# Altium PCB PCBModuleM02.PcbDoc (part 2 of 2)
Units mm, origin at the board's own origin, x right, y up, seen from the top; angles counter-clockwise.
Board outline 149.86 x 99.06 mm, 2 copper layers (Top Layer, Bottom Layer); 167 components, 166 nets, 568 pads, 73 vias.
Unrouted connection lines stored in the file: 37.
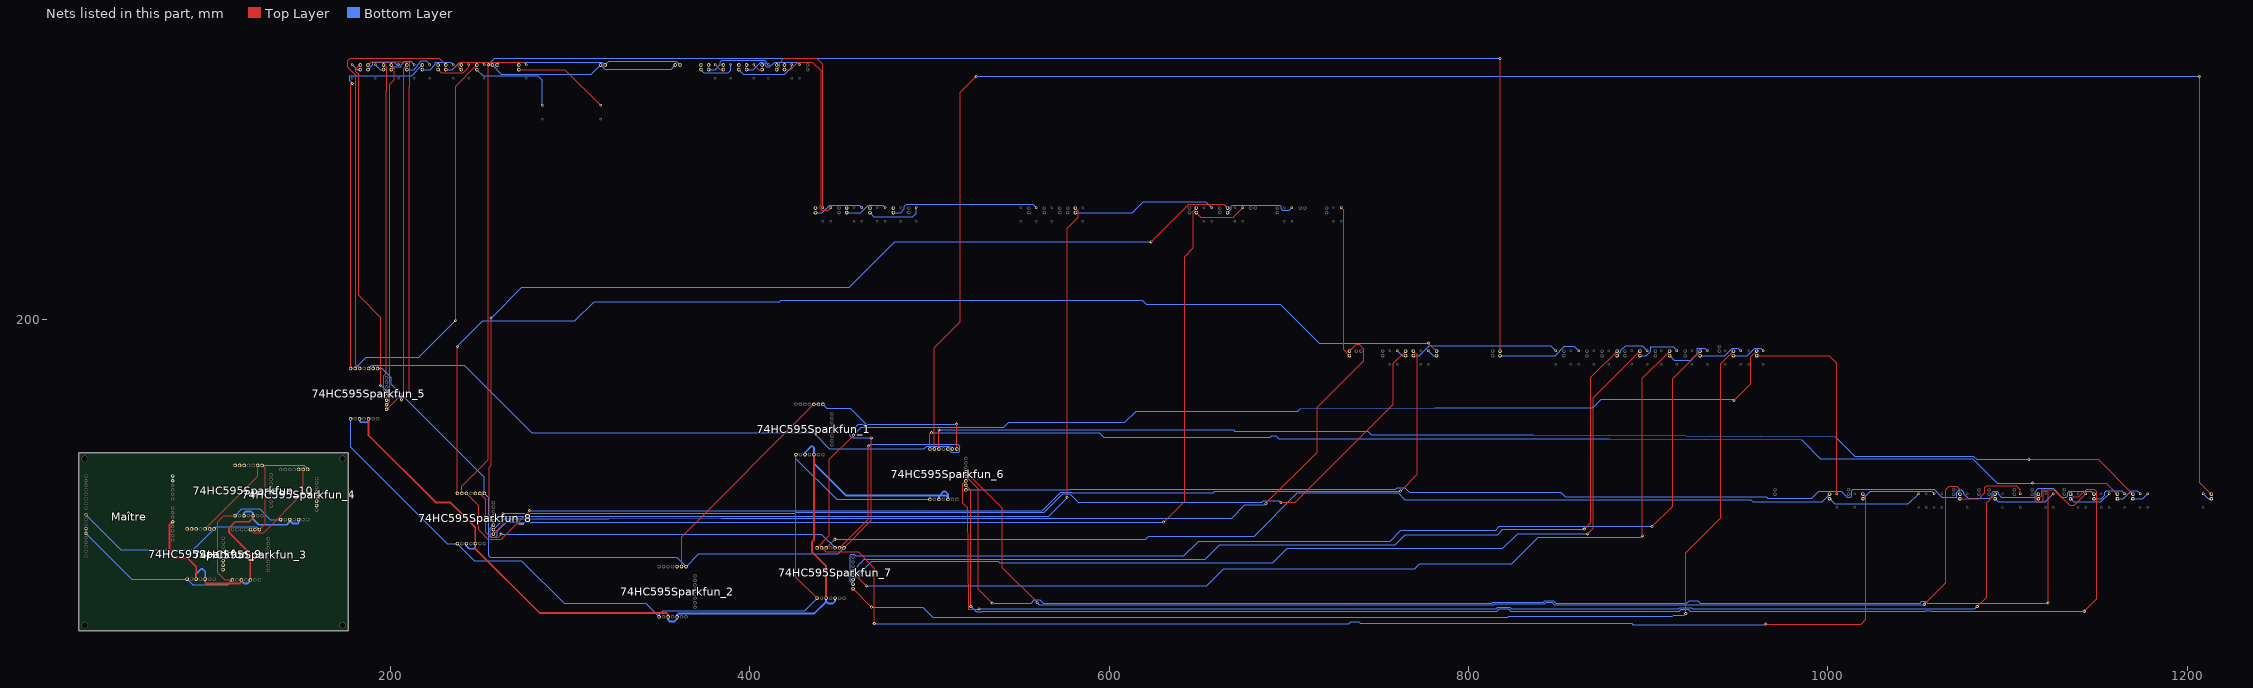
[diagram p2: the nets of this part, all layers, seen from the top]

## Via types
v1: diameter 1.7, hole 0.8, Top Layer to Bottom Layer, 73 vias

## Nets (pads, with @x,y where several pads share a name; then routed paths per layer and width w, separated by ;. In a path a pad name is that pad's centre, name@x,y a point inside that pad or via, vN(x,y) a via of type N, cw(c..) or ccw(c..) an arc to the next point about the centre after c; other vN are vias at no path point) (continued)
Net29_1: 29.1 R?.2@440.69,262.255 | length 110.6
  Top Layer w0.5: 29.1@415.036,339.09 416.687,340.741 416.687,342.9 419.049,345.262 437.464,345.262 440.69,342.036 R?.2@440.69,262.255
Net29_2: 29.2 74HC595Sparkfun_4.16
Net30_1: 30.1 R?.2@423.418,341.884 | length 33.6
  Bottom Layer w0.5: 30.1@393.954,339.09 396.469,336.575 419.633,336.575 423.418,340.36 R?.2@423.418,341.884
Net30_2: 30.2 74HC595Sparkfun_4.17
Net31_1: 31.1 R?.2@402.336,341.884 | length 5.7
  Top Layer w0.5: R?.2@402.336,341.884 405.13,339.09 31.1@406.908,339.09
Net31_2: 31.2 74HC595Sparkfun_4.18
Net32_1: 32.1 R?.2@380.746,341.884 | length 5.7
  Top Layer w0.5: R?.2@380.746,341.884 383.54,339.09 32.1@385.318,339.09
Net32_2: 32.2 74HC595Sparkfun_4.19
Net33_1: 33.1 R?.2@284.607,319.151 | length 52.8
  Bottom Layer w0.5: 33.1@248.158,339.09 251.587,335.661 281.94,335.661 284.607,332.994 R?.2@284.607,319.151
Net33_2: 33.2 74HC595Sparkfun_5.13 | length 214.1
  Top Layer w0.5: v1(236.372,199.466) 236.423,272.669 236.423,329.895 33.2@248.158,341.63
  Bottom Layer w0.5: 74HC595Sparkfun_5.13@180.42,172.72 186.668,178.968 215.875,178.968 v1(236.372,199.466)
Net34_1: 34.1 R?.2@252.222,341.884 | length 23.7
  Bottom Layer w0.5: 34.1@230.886,339.09 234.569,339.09 238.76,343.281 250.825,343.281 R?.2@252.222,341.884
Net34_2: 34.2 74HC595Sparkfun_5.12 | length 230.4
  Top Layer w0.5: 74HC595Sparkfun_5.12@182.92,172.72 180.848,174.792 180.848,336.017 176.403,340.462 176.403,343.865 177.8,345.262 227.254,345.262 34.2@230.886,341.63
Net35_1: 35.1 R?.2@234.95,341.884 | length 20.3
  Bottom Layer w0.5: 35.1@217.805,339.09 222.098,339.09 224.917,341.909 224.917,343.281 233.553,343.281 R?.2@234.95,341.884
Net35_2: 35.2 74HC595Sparkfun_5.14 | length 206.9
  Top Layer w0.5: 74HC595Sparkfun_5.14@177.92,172.72 177.902,172.72 177.902,330.505 v1(178.791,331.394)
  Bottom Layer w0.5: v1(178.791,331.394) 177.292,332.892 177.292,335.686 211.861,335.686 35.2@217.805,341.63
Net36_1: 36.1 R?.2@221.996,341.884 | length 16
  Bottom Layer w0.5: 36.1@209.169,339.09 213.208,339.09 215.392,342.138 217.17,343.916 219.964,343.916 R?.2@221.996,341.884
Net36_2: 36.2 74HC595Sparkfun_5.15 | length 196.3
  Top Layer w0.5: 74HC595Sparkfun_5.15@197.92,150.02 207.366,159.466 207.366,339.827 36.2@209.169,341.63
Net37_1: 37.1 R?.2@213.233,341.884 | length 16
  Bottom Layer w0.5: 37.1@200.533,339.09 201.955,340.512 205.969,340.512 205.969,341.63 208.051,343.713 211.404,343.713 R?.2@213.233,341.884
Net37_2: 37.2 74HC595Sparkfun_5.16 | length 191.6
  Top Layer w0.5: 74HC595Sparkfun_5.16@197.92,152.52 199.644,154.244 199.644,330.886 202.184,333.426 202.184,339.979 37.2@200.533,341.63
Net38_1: 38.1 R?.2@204.597,341.884 | length 20.2
  Bottom Layer w0.5: 38.1@187.579,339.09 190.271,341.782 190.271,343.281 202.184,343.281 203.581,341.884 R?.2@204.597,341.884
Net38_2: 38.2 74HC595Sparkfun_5.17 | length 223
  Top Layer w0.5: 38.2@187.579,341.63 189.484,343.535 210.185,343.535 210.82,342.9 210.82,329.54 210.49,329.209 210.49,159.563 v1(206.223,155.296)
  Bottom Layer w0.5: 74HC595Sparkfun_5.17@197.92,157.52 203.998,157.52 v1(206.223,155.296)
Net39_1: 39.1 R?.2@191.643,341.884 | length 5.7
  Bottom Layer w0.5: R?.2@191.643,341.884 194.437,339.09 39.1@196.215,339.09
Net39_2: 39.2 74HC595Sparkfun_5.18 | length 188.6
  Top Layer w0.5: 39.2@196.215,341.63 197.866,339.979 197.866,327.685 197.637,327.457 197.637,170.129 196.266,168.758 196.266,156.674 74HC595Sparkfun_5.18@197.92,155.02
Net40_1: 40.1 R?.2@178.689,341.884 | length 5.7
  Bottom Layer w0.5: R?.2@178.689,341.884 181.483,339.09 40.1@183.261,339.09
Net40_2: 40.2 74HC595Sparkfun_5.19 | length 189.7
  Top Layer w0.5: 40.2@183.261,341.63 180.88,339.249 180.88,337.984 182.296,336.568 182.296,213.335 194.589,201.041 v1(194.589,163.351)
  Bottom Layer w0.5: v1(194.589,163.351) 74HC595Sparkfun_5.19@197.92,160.02
Net41_1: 41.1 R?.2@1208.913,102.997 | length 5.7
  Bottom Layer w0.5: R?.2@1208.913,102.997 1211.707,100.203 41.1@1213.485,100.203
Net41_2: 41.2 74HC595Sparkfun_6.13 | length 1133.2
  Top Layer w0.5: 74HC595Sparkfun_6.13@502.819,127.889 502.819,184.303 517.169,198.653 517.169,326.466 v1(525.983,335.28) ; v1(1207.008,335.28) 1207.008,109.22 41.2@1213.485,102.743
  Bottom Layer w0.5: v1(525.983,335.28) v1(1207.008,335.28)
Net42_1: 42.1 R?.2@1178.179,102.997 | length 9.5
  Bottom Layer w0.5: 42.1@1169.797,100.203 1175.385,100.203 R?.2@1178.179,102.997
Net42_2: 42.2 74HC595Sparkfun_6.12 | length 689.5
  Top Layer w0.5: v1(505.308,138.506) 505.319,138.495 74HC595Sparkfun_6.12@505.319,127.889 ; v1(1111.961,122.098) 1150.442,122.098 42.2@1169.797,102.743
  Bottom Layer w0.5: v1(505.308,138.506) 669.29,138.506 670.052,137.744 743.89,137.744 745.896,135.738 835.99,135.738 921.258,135.179 1004.24,134.772 1015.187,123.825 1081.1,123.825 1082.827,122.098 v1(1111.961,122.098)
Net43_1: 43.1 R?.2@1173.861,102.997 | length 15.3
  Bottom Layer w0.5: 43.1@1161.161,100.203 1164.438,100.203 1169.01,104.775 1172.083,104.775 R?.2@1173.861,102.997
Net43_2: 43.2 74HC595Sparkfun_6.14 | length 684.1
  Top Layer w0.5: 74HC595Sparkfun_6.14@500.319,127.889 500.319,136.083 v1(501.193,136.957) ; v1(1113.968,108.966) 1154.938,108.966 43.2@1161.161,102.743
  Bottom Layer w0.5: v1(501.193,136.957) 594.563,136.957 597.154,134.366 689.737,134.366 690.622,135.251 692.737,135.251 694.435,133.553 878.815,133.553 985.495,132.944 995.858,122.58 1080.694,122.58 1094.308,108.966 v1(1113.968,108.966)
Net44_1: 44.1 R?.2@1165.225,102.997 | length 20.4
  Bottom Layer w0.5: 44.1@1148.207,100.203 1152.144,100.203 1154.227,102.286 1154.227,103.861 1154.984,104.618 1163.604,104.618 R?.2@1165.225,102.997
Net44_2: 44.2 74HC595Sparkfun_6.15 | length 658.5
  Bottom Layer w0.5: 74HC595Sparkfun_6.15@520.319,105.189 520.319,105.207 577.952,105.207 578.104,105.359 664.388,105.359 664.591,105.562 759.587,105.562 760.298,106.274 764.718,106.274 767.105,103.886 851.357,103.886 853.999,101.244 965.911,101.244 966.699,100.457 991.108,100.457 995.045,104.394 1007.618,104.394 1010.92,101.092 1012.825,101.092 1013.485,101.752 1013.485,104.75 1014.095,105.359 1059.18,105.359 1063.447,101.092 1071.753,101.092 1071.753,103.734 1073.15,105.131 1074.42,105.131 1075.715,103.835 1075.715,102.87 1078.205,100.381 1090.295,100.381 1091.514,101.6 1091.514,103.708 1092.2,104.394 1094.105,104.394 1094.867,103.632 1094.867,102.87 1096.645,101.092 1115.517,101.092 1115.517,104.14 1117.295,105.918 1125.398,105.918 1130.3,101.016 1132.84,101.016 1133.475,101.651 1133.475,103.455 1134.414,104.394 1146.556,104.394 44.2@1148.207,102.743
Net45_1: 45.1 R?.2@1156.589,102.997 | length 24
  Bottom Layer w0.5: 45.1@1135.253,100.203 1137.031,98.425 1152.017,98.425 R?.2@1156.589,102.997
Net45_2: 45.2 74HC595Sparkfun_6.16 | length 779.2
  Top Layer w0.5: 74HC595Sparkfun_6.16@520.319,107.689 523.037,104.971 v1(523.037,40.234) ; 45.2@1135.253,102.743 1136.802,101.194 1139.8,101.194 1144.143,105.537 1148.461,105.537 1149.858,104.14 1149.858,44.552 v1(1142.898,37.592)
  Bottom Layer w0.5: v1(523.037,40.234) 525.968,37.302 529.04,37.302 529.33,37.592 815.899,37.592 817.309,39.001 822.112,39.001 823.522,37.592 917.433,37.592 918.568,38.727 922.244,38.727 923.379,37.592 1054.222,37.592 1054.595,37.965 1057.222,37.965 1057.595,37.592 v1(1142.898,37.592)
Net46_1: 46.1 R?.2@1143.635,102.997 | length 36.7
  Top Layer w0.5: 46.1@1117.219,100.203 1119.016,102 1119.016,105.247 1125.891,105.247 1134.618,96.52 1137.158,96.52 R?.2@1143.635,102.997
Net46_2: 46.2 74HC595Sparkfun_6.17 | length 748.2
  Top Layer w0.5: 74HC595Sparkfun_6.17@520.319,112.689 527.228,105.78 527.228,49.86 v1(534.975,42.113) ; 46.2@1117.219,102.743 1115.568,101.092 1115.568,99.315 1116.33,98.553 1119.403,98.553 1119.933,99.083 1119.933,104.347 1122.655,104.347 v1(1122.655,42.113)
  Bottom Layer w0.5: v1(534.975,42.113) 556.587,42.113 558.443,43.969 561.443,43.969 563.299,42.113 813.22,42.113 813.709,42.602 841.63,42.602 842.506,43.477 847.306,43.477 848.67,42.113 921.549,42.113 922.973,43.537 927.773,43.537 929.197,42.113 1051.412,42.113 1052.319,43.02 1054.412,43.02 1055.319,42.113 v1(1122.655,42.113)
Net47_1: 47.1 R?.2@1125.601,102.997 | length 35
  Bottom Layer w0.5: 47.1@1093.216,100.203 1094.969,98.45 1121.054,98.45 R?.2@1125.601,102.997
Net47_2: 47.2 74HC595Sparkfun_6.18 | length 703.5
  Top Layer w0.5: 74HC595Sparkfun_6.18@520.319,110.189 518.668,108.538 518.668,97.765 520.979,95.453 521.513,38.71 527.431,38.71 v1(527.634,38.913) ; v1(1083.234,40.234) 1088.39,45.39 1088.39,97.917 47.2@1093.216,102.743
  Bottom Layer w0.5: v1(527.634,38.913) 815.42,38.913 816.409,39.901 823.009,39.901 823.998,38.913 916.954,38.913 917.668,39.627 924.268,39.627 924.982,38.913 1081.913,38.913 v1(1083.234,40.234)
Net48_1: 48.1 R?.2@1107.186,102.997 | length 41.7
  Top Layer w0.5: 48.1@1073.531,100.203 1084.224,100.203 1087.501,103.48 1087.501,106.604 1088.39,107.493 1104.9,107.493 1107.186,105.207 R?.2@1107.186,102.997
Net48_2: 48.2 74HC595Sparkfun_6.19 | length 665.3
  Top Layer w0.5: 74HC595Sparkfun_6.19@520.319,115.189 540.639,94.869 540.639,61.773 v1(559.943,42.469) ; v1(1053.821,41.478) 1065.784,53.442 1065.784,105.181 1067.664,107.061 1071.88,107.061 1073.531,105.41 48.2@1073.531,102.743
  Bottom Layer w0.5: v1(559.943,42.469) 561.213,41.199 814.106,41.199 814.609,41.702 842.53,41.702 843.406,42.577 846.406,42.577 847.784,41.199 1053.541,41.199 v1(1053.821,41.478)
Net49_1: 49.1 R?.2@1059.18,102.997 | length 41.9
  Bottom Layer w0.5: 49.1@1019.556,100.203 1023.722,104.369 1057.808,104.369 R?.2@1059.18,102.997
Net49_2: 49.2 74HC595Sparkfun_7.13 | length 689.4
  Top Layer w0.5: 74HC595Sparkfun_7.13@440.008,72.898 442.243,70.663 460.299,70.663 469.316,61.646 v1(469.316,30.683) ; v1(965.276,30.48) 1018.667,30.48 1021.207,33.02 1021.207,101.092 49.2@1019.556,102.743
  Bottom Layer w0.5: v1(469.316,30.683) 733.527,30.683 734.453,31.61 738.975,31.61 739.75,30.836 890.829,30.836 891.464,30.201 964.997,30.201 v1(965.276,30.48)
Net50_1: 50.1 R?.2@1050.544,102.997 | length 53
  Bottom Layer w0.5: 50.1@1001.014,100.203 1003.859,97.358 1044.905,97.358 R?.2@1050.544,102.997
Net50_2: 50.2 74HC595Sparkfun_7.12 | length 574.9
  Top Layer w0.5: 74HC595Sparkfun_7.12@442.508,72.898 447.258,77.648 v1(447.421,77.648)
  Bottom Layer w0.5: v1(447.421,77.648) 620.37,77.648 622.071,79.35 680.72,79.35 704.799,103.429 760.97,103.429 764.653,99.746 957.301,99.746 958.494,98.552 996.823,98.552 50.2@1001.014,102.743
Net51_1: 51.1 R?.2@1005.078,102.997 | length 118.9
  Top Layer w0.5: 51.1@960.501,179.832 1000.76,179.832 1005.078,175.514 R?.2@1005.078,102.997
Net51_2: 51.2 74HC595Sparkfun_7.14 | length 602.3
  Top Layer w0.5: 74HC595Sparkfun_7.14@437.508,72.898 444.373,79.763 444.373,122.225 v1(457.784,135.636) ; v1(947.953,154.915) 957.301,164.262 957.301,179.172 51.2@960.501,182.372
  Bottom Layer w0.5: v1(457.784,135.636) 462.178,140.03 541.376,140.03 544.068,142.723 608.838,142.723 615.036,148.92 705.129,148.92 706.552,150.343 781.304,150.749 869.239,150.749 874.039,155.55 947.318,155.55 v1(947.953,154.915)
Net52_1: 52.1 R?.2@964.057,182.626 | length 18.8
  Bottom Layer w0.5: 52.1@947.547,179.832 955.294,179.832 959.485,184.023 962.66,184.023 R?.2@964.057,182.626
Net52_2: 52.2 74HC595Sparkfun_7.15 | length 628
  Top Layer w0.5: 74HC595Sparkfun_7.15@457.508,50.198 467.792,39.914 v1(467.792,39.878) ; v1(920.979,36.322) 920.979,70.206 940.46,89.687 940.46,175.285 52.2@947.547,182.372
  Bottom Layer w0.5: v1(467.792,39.878) 496.392,39.878 501.955,34.315 741.502,34.315 741.578,34.239 821.893,34.239 822.427,34.773 913.587,34.773 914.222,35.408 920.064,35.408 v1(920.979,36.322)
Net53_1: 53.1 R?.2@951.611,182.626 | length 24.9
  Bottom Layer w0.5: 53.1@929.005,179.832 938.266,179.832 938.276,179.822 942.584,179.822 946.785,184.023 950.214,184.023 R?.2@951.611,182.626
Net53_2: 53.2 74HC595Sparkfun_7.16 | length 579.2
  Top Layer w0.5: v1(902.298,84.774) 913.638,96.114 913.638,167.005 53.2@929.005,182.372
  Bottom Layer w0.5: 74HC595Sparkfun_7.16@457.508,52.698 455.858,54.348 455.858,68.641 456.565,69.348 458.235,69.348 459.156,68.428 641.604,68.428 649.808,76.632 756.412,76.632 762.406,82.626 815.162,82.626 817.31,84.774 v1(902.298,84.774)
Net54_1: 54.1 R?.2@933.069,182.626 | length 27.2
  Bottom Layer w0.5: 54.1@911.987,179.832 914.476,177.343 923.723,177.343 927.355,180.975 927.355,184.022 931.673,184.022 R?.2@933.069,182.626
Net54_2: 54.2 74HC595Sparkfun_7.17 | length 562.4
  Top Layer w0.5: 74HC595Sparkfun_7.17@457.508,57.698 458.989,57.698 v1(464.947,51.74) ; v1(896.874,79.553) 896.874,167.259 54.2@911.987,182.372
  Bottom Layer w0.5: v1(464.947,51.74) 654.329,51.74 663.854,61.265 770.052,61.265 772.82,64.033 824.281,64.033 838.911,78.664 895.985,78.664 v1(896.874,79.553)
Net55_1: 55.1 R?.2@916.051,182.626 | length 25.6
  Bottom Layer w0.5: 55.1@895.477,179.832 899.008,179.832 901.563,182.387 901.563,184.922 914.537,184.922 914.537,184.14 R?.2@916.051,182.626
Net55_2: 55.2 74HC595Sparkfun_7.18 | length 534
  Top Layer w0.5: v1(866.343,80.696) 869.467,83.82 869.467,156.362 55.2@895.477,182.372
  Bottom Layer w0.5: 74HC595Sparkfun_7.18@457.508,55.198 467.842,65.532 538.277,65.532 539.267,64.541 691.083,64.541 699.059,72.517 819.252,72.517 827.43,80.696 v1(866.343,80.696)
Net56_1: 56.1 R?.2@899.541,182.626 | length 20.8
  Bottom Layer w0.5: 56.1@882.777,179.832 884.936,181.991 884.936,182.88 887.501,185.445 896.722,185.445 R?.2@899.541,182.626
Net56_2: 56.2 74HC595Sparkfun_7.19 | length 523.2
  Top Layer w0.5: v1(864.489,83.261) 868.096,86.868 868.096,167.691 56.2@882.777,182.372
  Bottom Layer w0.5: 74HC595Sparkfun_7.19@457.508,60.198 463.807,66.497 653.644,66.497 661.721,74.574 759.257,74.574 764.972,80.289 816.254,80.289 819.226,83.261 v1(864.489,83.261)
Net57_1: 57.1 R?.2@861.441,182.626 | length 47
  Bottom Layer w0.5: 57.1@817.626,179.832 848.252,179.832 853.44,185.02 859.047,185.02 R?.2@861.441,182.626
Net57_2: 57.2 74HC595Sparkfun_8.13 | length 972.1
  Top Layer w0.5: 74HC595Sparkfun_8.13@239.802,103.211 239.802,107.087 254.508,121.793 v1(254.508,341.757) ; 57.2@817.626,182.372 v1(817.626,345.262)
  Bottom Layer w0.5: v1(254.508,341.757) 258.013,345.262 v1(817.626,345.262)
Net58_1: 58.1 R?.2@848.614,182.626 | length 82.7
  Bottom Layer w0.5: 58.1@769.366,179.832 772.795,179.832 778.332,185.369 845.871,185.369 R?.2@848.614,182.626
Net58_2: 58.2 74HC595Sparkfun_8.12 | length 632.2
  Top Layer w0.5: 74HC595Sparkfun_8.12@242.302,103.211 249.123,96.39 249.123,82.855 254.255,77.723 261.695,77.723 v1(277.571,93.599) ; v1(762.243,104.496) 771.495,113.747 771.495,180.243 58.2@769.366,182.372
  Bottom Layer w0.5: v1(277.571,93.599) 562.965,93.599 573.136,103.77 579.082,103.77 579.194,103.657 658.08,103.657 658.785,104.362 706.964,104.362 707.098,104.496 v1(762.243,104.496)
Net59_1: 59.1 R?.2@777.748,182.626 | length 5.7
  Bottom Layer w0.5: R?.2@777.748,182.626 780.542,179.832 59.1@782.32,179.832
Net59_2: 59.2 74HC595Sparkfun_8.14 | length 649.2
  Top Layer w0.5: 74HC595Sparkfun_8.14@237.302,103.211 v1(237.302,184.997) ; v1(777.803,186.889) 59.2@782.32,182.372
  Bottom Layer w0.5: v1(237.302,184.997) 251.539,199.234 302.739,199.234 313.487,209.982 416.738,209.982 417.424,210.668 618.414,210.668 620.611,208.47 695.413,208.47 716.994,186.889 v1(777.803,186.889)
Net60_1: 60.1 R?.2@760.476,182.626 | length 5.7
  Bottom Layer w0.5: R?.2@760.476,182.626 763.27,179.832 60.1@765.048,179.832
Net60_2: 60.2 74HC595Sparkfun_8.15 | length 571.5
  Top Layer w0.5: 74HC595Sparkfun_8.15@257.302,80.511 262.788,85.997 v1(262.788,92.05) ; v1(695.706,98.171) 703.783,98.171 758.317,152.705 758.317,175.641 60.2@765.048,182.372
  Bottom Layer w0.5: v1(262.788,92.05) 425.221,92.05 425.729,92.558 564.007,92.558 574.319,102.87 578.18,102.87 582.879,98.171 684.934,98.171 685.824,99.061 694.816,99.061 v1(695.706,98.171)
Net61_1: 61.1 R?.2@729.234,262.255 | length 84.3
  Top Layer w0.5: R?.2@729.234,262.255 730.606,260.883 730.606,183.032 61.1@733.806,179.832
Net61_2: 61.2 74HC595Sparkfun_8.16 | length 555
  Top Layer w0.5: v1(687.324,97.561) 715.823,126.06 715.823,151.079 741.807,177.063 741.807,183.464 739.14,186.131 737.565,186.131 61.2@733.806,182.372
  Bottom Layer w0.5: 74HC595Sparkfun_8.16@257.302,83.011 263.36,89.069 321.691,89.103 384.581,89.459 668.172,89.459 675.665,96.952 686.714,96.952 v1(687.324,97.561)
Net62_1: 62.1 R?.2@701.802,262.255 | length 41.1
  Bottom Layer w0.5: 62.1@665.988,259.461 668.147,261.62 668.147,263.169 668.629,263.651 695.325,263.651 695.731,263.245 695.731,261.62 696.468,260.883 700.43,260.883 R?.2@701.802,262.255
Net62_2: 62.2 74HC595Sparkfun_8.17 | length 551.2
  Top Layer w0.5: v1(256.032,200.736) 256.032,118.912 254.95,117.831 254.95,90.363 74HC595Sparkfun_8.17@257.302,88.011 ; v1(623.392,243.154) 644.296,264.058 663.931,264.058 62.2@665.988,262.001
  Bottom Layer w0.5: v1(256.032,200.736) 273.228,217.932 455.549,217.932 480.771,243.154 v1(623.392,243.154)
Net63_1: 63.1 R?.2@674.37,262.255 | length 29
  Top Layer w0.5: 63.1@648.589,259.461 651.104,256.946 669.061,256.946 R?.2@674.37,262.255
Net63_2: 63.2 74HC595Sparkfun_8.18 | length 568.7
  Top Layer w0.5: v1(630.326,87.173) 642.061,98.908 642.061,234.925 646.938,239.801 646.938,260.35 63.2@648.589,262.001
  Bottom Layer w0.5: 74HC595Sparkfun_8.18@257.302,85.511 255.652,83.861 255.652,79.73 256.54,78.842 258.445,78.842 259.563,79.959 259.563,82.245 264.49,87.173 v1(630.326,87.173)
Net64_1: 64.1 R?.2@657.098,262.255 | length 79.6
  Bottom Layer w0.5: 64.1@581.279,259.461 613.029,259.461 619.019,265.451 653.902,265.451 R?.2@657.098,262.255
Net64_2: 64.2 74HC595Sparkfun_8.19 | length 488.1
  Top Layer w0.5: v1(576.682,100.813) 576.682,250.673 582.93,256.921 582.93,260.35 64.2@581.279,262.001
  Bottom Layer w0.5: 74HC595Sparkfun_8.19@257.302,90.511 258.663,90.511 258.674,90.5 566.369,90.5 v1(576.682,100.813)
Net65_1: 65.1 R?.2@559.435,262.255 | length 83.1
  Bottom Layer w0.5: 65.1@479.933,259.461 483.997,259.461 486.019,261.483 486.019,262.89 487.289,264.16 557.53,264.16 R?.2@559.435,262.255
Net65_2: 65.2 74HC595Sparkfun_9.13
Net66_1: 66.1 R?.2@492.633,262.255 | length 30.5
  Bottom Layer w0.5: 66.1@466.979,259.461 469.163,257.277 490.83,257.277 492.633,259.08 R?.2@492.633,262.255
Net66_2: 66.2 74HC595Sparkfun_9.12
Net67_1: 67.1 R?.2@475.361,262.255 | length 23.7
  Bottom Layer w0.5: 67.1@454.025,259.461 461.899,259.461 466.09,263.652 473.964,263.652 R?.2@475.361,262.255
Net67_2: 67.2 74HC595Sparkfun_9.14
Net68_1: 68.1 R?.2@462.407,262.255 | length 28.1
  Bottom Layer w0.5: 68.1@436.626,259.461 440.309,259.461 444.5,263.652 461.01,263.652 R?.2@462.407,262.255
Net68_2: 68.2 74HC595Sparkfun_9.15
Net69_1: 69.1 R?.2@445.135,262.255 | length 107.7
  Top Layer w0.5: 69.1@419.354,339.09 422.554,339.09 426.745,343.281 434.797,343.281 439.699,338.379 439.699,263.961 439.34,263.601 439.34,261.62 440.055,260.905 443.785,260.905 R?.2@445.135,262.255
Net69_2: 69.2 74HC595Sparkfun_9.16
Net70_1: 70.1 R?.2@427.736,341.884 | length 34.6
  Bottom Layer w0.5: 70.1@398.272,339.09 401.98,339.09 406.17,343.28 407.67,343.28 408.558,342.392 408.558,341.529 409.575,340.512 411.251,340.512 414.02,343.281 426.339,343.281 R?.2@427.736,341.884
Net70_2: 70.2 74HC595Sparkfun_9.17
Net71_1: 71.1 R?.2@410.464,341.884 | length 37.1
  Bottom Layer w0.5: 71.1@377.19,339.09 380.848,339.09 383.667,341.909 383.667,343.281 384.566,344.18 408.168,344.18 R?.2@410.464,341.884
Net71_2: 71.2 74HC595Sparkfun_9.18
Net72_1: 72.1 R?.2@389.382,341.884 | length 20.9
  Bottom Layer w0.5: 72.1@372.872,339.09 374.523,337.439 388.112,337.439 389.382,338.709 R?.2@389.382,341.884
Net72_2: 72.2 74HC595Sparkfun_9.19
Net73_1: 73.1 R?.2@317.119,319.151 | length 53.9
  Top Layer w0.5: 73.1@271.526,339.09 297.18,339.09 R?.2@317.119,319.151
Net73_2: 73.2 74HC595Sparkfun_10.13
Net74_1: 74.1 R?.2@275.59,341.884 | length 42.7
  Top Layer w0.5: 74.1@239.522,339.09 237.871,340.741 237.871,342.392 238.76,343.281 274.193,343.281 R?.2@275.59,341.884
Net74_2: 74.2 74HC595Sparkfun_10.12
Net74HC595Sparkfun_1_7: 74HC595Sparkfun_1.7 74HC595Sparkfun_2.7 74HC595Sparkfun_3.7 74HC595Sparkfun_4.7 74HC595Sparkfun_5.7 74HC595Sparkfun_6.7 74HC595Sparkfun_7.7 74HC595Sparkfun_8.7 74HC595Sparkfun_9.7 74HC595Sparkfun_10.7 Maître.D12 | length 663.8
  Top Layer w0.5: 74HC595Sparkfun_3.7@112.08,55.018 107.745,55.018 103.861,58.903 103.861,87.351 107.255,90.745 74HC595Sparkfun_10.7@113.618,90.745 ; 74HC595Sparkfun_1.7@425.77,124.781 425.77,56.636 74HC595Sparkfun_7.7@437.508,44.898
  Bottom Layer w0.5: Maître.D12@30.607,81.026 56.194,55.439 74HC595Sparkfun_9.7@86.934,55.439 90.024,52.349 109.411,52.349 74HC595Sparkfun_3.7@112.08,55.018 ; 74HC595Sparkfun_10.7@113.618,90.745 117.386,94.513 127.254,94.513 133.221,88.546 74HC595Sparkfun_4.7@139.004,88.546 ; 74HC595Sparkfun_5.7@177.92,144.72 177.92,128.988 231.697,75.211 74HC595Sparkfun_8.7@237.302,75.211 246.702,65.811 272.821,65.811 296.723,41.91 342.104,41.91 74HC595Sparkfun_2.7@349.57,34.444 349.57,35.728 351.79,37.948 430.558,37.948 74HC595Sparkfun_7.7@437.508,44.898 ; 74HC595Sparkfun_1.7@425.77,124.781 425.77,122.469 448.35,99.889 74HC595Sparkfun_6.7@500.319,99.889
Net74HC595Sparkfun_1_8: 74HC595Sparkfun_1.8 74HC595Sparkfun_2.8 74HC595Sparkfun_3.8 74HC595Sparkfun_4.8 74HC595Sparkfun_5.8 74HC595Sparkfun_6.8 74HC595Sparkfun_7.8 74HC595Sparkfun_8.8 74HC595Sparkfun_9.8 74HC595Sparkfun_10.8 Maître.D8 | length 695.8
  Top Layer w0.5: 74HC595Sparkfun_3.8@127.08,83.018 130.277,86.215 130.277,117.086 74HC595Sparkfun_10.8@128.618,118.745 ; 74HC595Sparkfun_7.8@452.508,72.898 467.716,88.106 v1(467.716,134.112) ; v1(515.01,141.707) 515.319,141.398 74HC595Sparkfun_6.8@515.319,127.889
  Bottom Layer w0.5: Maître.D8@30.607,91.186 49.987,71.806 90.301,71.806 74HC595Sparkfun_9.8@101.934,83.439 103.179,84.684 125.414,84.684 74HC595Sparkfun_3.8@127.08,83.018 ; 74HC595Sparkfun_10.8@128.618,118.745 151.805,118.745 74HC595Sparkfun_4.8@154.004,116.546 ; 74HC595Sparkfun_5.8@192.92,172.72 195.326,172.72 200.406,167.64 200.406,163.961 252.302,112.065 74HC595Sparkfun_8.8@252.302,103.211 254.752,100.761 254.752,68.488 255.727,67.513 359.501,67.513 74HC595Sparkfun_2.8@364.57,62.444 371.697,69.571 449.181,69.571 74HC595Sparkfun_7.8@452.508,72.898 ; 74HC595Sparkfun_1.8@440.77,152.781 442.954,150.597 455.93,150.597 464.82,141.707 ; v1(467.716,134.112) 456.69,134.112 455.93,134.872 455.93,137.108 460.529,141.707 464.82,141.707 ; v1(515.01,141.707) 464.82,141.707
Net74HC595Sparkfun_1_9: 74HC595Sparkfun_1.9 Maître.D11
Net74HC595Sparkfun_1_10: 74HC595Sparkfun_1.10 74HC595Sparkfun_2.9 | length 120.9
  Top Layer w0.5: 74HC595Sparkfun_2.9@362.07,62.444 362.07,64.726 362.052,64.745 362.052,79.027 435.77,152.745 74HC595Sparkfun_1.10@435.77,152.781
Net74HC595Sparkfun_2_10: 74HC595Sparkfun_2.10 74HC595Sparkfun_3.9
Net74HC595Sparkfun_3_10: 74HC595Sparkfun_3.10 74HC595Sparkfun_4.9 | length 52.4
  Top Layer w0.5: 74HC595Sparkfun_3.10@122.08,83.018 123.742,81.356 129.438,81.356 151.504,103.422 74HC595Sparkfun_4.9@151.504,116.546
Net74HC595Sparkfun_4_10: 74HC595Sparkfun_4.10 74HC595Sparkfun_5.9
Net74HC595Sparkfun_5_10: 74HC595Sparkfun_5.10 74HC595Sparkfun_6.9 | length 346.1
  Bottom Layer w0.5: 74HC595Sparkfun_5.10@187.92,172.72 189.571,174.371 241.224,174.371 278.765,136.83 435.559,136.83 444.4,127.989 497.076,127.989 498.627,129.54 511.168,129.54 74HC595Sparkfun_6.9@512.819,127.889
Net74HC595Sparkfun_6_10: 74HC595Sparkfun_6.10 74HC595Sparkfun_7.9 | length 125.4
  Top Layer w0.5: 74HC595Sparkfun_7.9@450.008,72.898 466.039,88.929 v1(466.039,129.489)
  Bottom Layer w0.5: v1(466.039,129.489) 467.192,130.642 515.738,130.642 516.992,129.388 516.992,126.873 516.255,126.136 512.072,126.136 74HC595Sparkfun_6.10@510.319,127.889
Net74HC595Sparkfun_7_10: 74HC595Sparkfun_7.10 74HC595Sparkfun_8.9 | length 222.5
  Top Layer w0.5: 74HC595Sparkfun_8.9@249.802,103.211 253.035,99.978 253.035,81.458 255.651,78.842 260.045,78.842 v1(261.696,80.493)
  Bottom Layer w0.5: v1(261.696,80.493) 439.913,80.493 74HC595Sparkfun_7.10@447.508,72.898
Net74HC595Sparkfun_8_10: 74HC595Sparkfun_8.10 74HC595Sparkfun_9.9
Net74HC595Sparkfun_9_10: 74HC595Sparkfun_9.10 74HC595Sparkfun_10.9 | length 47.4
  Top Layer w0.5: 74HC595Sparkfun_9.10@96.934,83.439 126.118,112.623 74HC595Sparkfun_10.9@126.118,118.745
Net74HC595Sparkfun_10_14: 74HC595Sparkfun_10.14 75.2
Net75_1: 75.1 R?.2@243.586,341.884 | length 20.4
  Top Layer w0.5: 75.1@226.568,339.09 228.219,337.439 240.665,337.439 243.586,340.36 R?.2@243.586,341.884
"NetEsclave 1_1": "Esclave 1.1" "Esclave 2.1" "Esclave 3.1" Maître.A5 | length 104.9
  Bottom Layer w0.5: 259.334,341.63 260.985,343.281 317.881,343.281 319.532,341.63 321.564,343.662 359.156,343.662 361.188,341.63
"NetEsclave 1_2": "Esclave 1.2" "Esclave 2.2" "Esclave 3.2" Maître.A4 | length 108
  Bottom Layer w0.5: 256.794,341.63 261.849,336.575 311.937,336.575 316.992,341.63 319.405,339.217 356.235,339.217 358.648,341.63
VCC: 74HC595Sparkfun_1.3 74HC595Sparkfun_1.5 74HC595Sparkfun_2.3 74HC595Sparkfun_2.5 74HC595Sparkfun_3.3 74HC595Sparkfun_3.5 74HC595Sparkfun_4.3 74HC595Sparkfun_4.5 74HC595Sparkfun_5.3 74HC595Sparkfun_5.5 74HC595Sparkfun_6.3 74HC595Sparkfun_6.5 74HC595Sparkfun_7.3 74HC595Sparkfun_7.5 74HC595Sparkfun_8.3 74HC595Sparkfun_8.5 74HC595Sparkfun_9.3 74HC595Sparkfun_9.5 74HC595Sparkfun_10.3 74HC595Sparkfun_10.5 Maître.5V | length 723.4
  Top Layer w1: Maître.5V@78.867,87.376 78.181,86.69 77.978,86.69 77.013,85.725 77.013,70.129 80.086,67.056 87.173,67.056 91.934,62.295 74HC595Sparkfun_9.5@91.934,55.439 ; 74HC595Sparkfun_9.3@96.934,55.439 96.934,53.84 97.79,52.984 116.205,52.984 117.08,53.859 74HC595Sparkfun_3.5@117.08,55.018 ; 74HC595Sparkfun_3.3@122.08,55.018 122.08,69.614 110.16,81.534 110.16,83.82 113.785,87.445 121.528,87.445 123.618,89.535 74HC595Sparkfun_10.3@123.618,90.745 ; 74HC595Sparkfun_5.3@187.92,144.72 187.92,135.422 225.171,98.171 233.426,98.171 247.302,84.295 74HC595Sparkfun_8.3@247.302,75.211 247.302,72.484 283.159,36.627 353.695,36.627 354.57,35.752 74HC595Sparkfun_2.5@354.57,34.444 ; 74HC595Sparkfun_1.3@435.77,124.781 435.77,77.3 434.708,76.238 434.708,70.422 442.508,62.622 74HC595Sparkfun_7.5@442.508,44.898
  Bottom Layer w1: 74HC595Sparkfun_9.5@91.934,55.439 91.934,58.42 94.779,61.265 95.359,61.265 96.934,59.69 74HC595Sparkfun_9.3@96.934,55.439 ; 74HC595Sparkfun_3.5@117.08,55.018 117.577,55.018 117.577,53.975 118.44,53.111 120.65,53.111 121.488,53.95 121.488,54.426 74HC595Sparkfun_3.3@122.08,55.018 ; 74HC595Sparkfun_10.5@118.618,90.745 118.618,92.304 119.38,93.066 122.627,93.066 123.618,92.075 74HC595Sparkfun_10.3@123.618,90.745 123.618,88.9 126.807,85.711 142.24,85.711 144.004,87.475 74HC595Sparkfun_4.5@144.004,88.546 144.501,88.546 144.501,87.63 145.771,86.36 148.369,86.36 149.004,86.995 74HC595Sparkfun_4.3@149.004,88.546 ; 74HC595Sparkfun_5.5@182.92,144.72 182.92,143.51 183.631,142.799 187.209,142.799 187.92,143.51 74HC595Sparkfun_5.3@187.92,144.72 ; 74HC595Sparkfun_8.5@242.302,75.211 242.302,73.953 243.865,72.39 246.355,72.39 247.302,73.337 74HC595Sparkfun_8.3@247.302,75.211 ; 74HC595Sparkfun_2.5@354.57,34.444 354.57,32.805 355.44,31.935 358.14,31.935 359.57,33.365 74HC595Sparkfun_2.3@359.57,34.444 359.57,35.56 360.357,36.347 435.879,36.347 442.508,42.977 442.508,43.18 ; 74HC595Sparkfun_1.5@430.77,124.781 430.77,125.868 434.34,129.438 434.975,129.438 435.77,128.643 74HC595Sparkfun_1.3@435.77,124.781 435.77,120.033 453.847,101.956 505.638,101.956 ; 74HC595Sparkfun_7.5@442.508,44.898 442.508,43.18 ; 74HC595Sparkfun_7.3@447.508,44.898 447.508,43.18 446.238,41.91 443.778,41.91 442.508,43.18 ; 74HC595Sparkfun_6.5@505.319,99.889 505.319,101.637 505.638,101.956 ; 74HC595Sparkfun_6.3@510.319,99.889 510.319,100.965 ; 505.638,101.956 509.328,101.956 510.319,100.965 ; 505.638,101.956 508,104.318 508.871,104.318 510.319,102.87 510.319,100.965
pads on no net: 74HC595Sparkfun_1.1 74HC595Sparkfun_1.2 74HC595Sparkfun_1.11 74HC595Sparkfun_1.20 74HC595Sparkfun_1.21 74HC595Sparkfun_1.22 74HC595Sparkfun_2.1 74HC595Sparkfun_2.2 74HC595Sparkfun_2.11 74HC595Sparkfun_2.20 74HC595Sparkfun_2.21 74HC595Sparkfun_2.22 74HC595Sparkfun_3.1 74HC595Sparkfun_3.2 74HC595Sparkfun_3.11 74HC595Sparkfun_3.20 74HC595Sparkfun_3.21 74HC595Sparkfun_3.22 74HC595Sparkfun_4.1 74HC595Sparkfun_4.2 74HC595Sparkfun_4.11 74HC595Sparkfun_4.20 74HC595Sparkfun_4.21 74HC595Sparkfun_4.22 74HC595Sparkfun_5.1 74HC595Sparkfun_5.2 74HC595Sparkfun_5.11 74HC595Sparkfun_5.20 74HC595Sparkfun_5.21 74HC595Sparkfun_5.22 74HC595Sparkfun_6.1 74HC595Sparkfun_6.2 74HC595Sparkfun_6.11 74HC595Sparkfun_6.20 74HC595Sparkfun_6.21 74HC595Sparkfun_6.22 74HC595Sparkfun_7.1 74HC595Sparkfun_7.2 74HC595Sparkfun_7.11 74HC595Sparkfun_7.20 74HC595Sparkfun_7.21 74HC595Sparkfun_7.22 74HC595Sparkfun_8.1 74HC595Sparkfun_8.2 74HC595Sparkfun_8.11 74HC595Sparkfun_8.20 74HC595Sparkfun_8.21 74HC595Sparkfun_8.22 74HC595Sparkfun_9.1 74HC595Sparkfun_9.2 74HC595Sparkfun_9.11 74HC595Sparkfun_9.20 74HC595Sparkfun_9.21 74HC595Sparkfun_9.22 74HC595Sparkfun_10.1 74HC595Sparkfun_10.2 74HC595Sparkfun_10.10 74HC595Sparkfun_10.11 74HC595Sparkfun_10.15 74HC595Sparkfun_10.16 74HC595Sparkfun_10.17 74HC595Sparkfun_10.18 74HC595Sparkfun_10.19 74HC595Sparkfun_10.20 74HC595Sparkfun_10.21 74HC595Sparkfun_10.22 Maître.3.3V Maître.A0 Maître.A1 Maître.A2 Maître.A3 Maître.AREF Maître.D2 Maître.D3 Maître.D4 Maître.D5 Maître.D6 Maître.D7 Maître.D9 Maître.D10 Maître.D13 Maître.GND@1 Maître.GND@2 Maître.IOREF Maître.NC Maître.RES Maître.RX Maître.SCL Maître.SDA Maître.TX Maître.VIN

## Silkscreen, mask and mechanical layers (free items; w line width, h text height)
Mechanical 1:
  the board outline again, w0.254

## Text inside footprints (layer, text, board x,y; h text height)
Maître: Top Overlay "GND" at 77.483,90.424 h0.86 r180; Top Overlay "GND" at 77.483,92.964 h0.86 r180; Top Overlay "+5V" at 77.483,87.884 h0.86 r180; Top Overlay "RST" at 77.483,82.804 h0.86 r180; Top Overlay "VIN" at 77.483,95.504 h0.86 r180; Top Overlay "+3.3V" at 77.483,85.344 h0.86 r180; Top Overlay "0" at 77.483,100.584 h0.86 r180; Top Overlay "1" at 77.483,103.124 h0.86 r180; Top Overlay "2" at 77.483,105.664 h0.86 r180; Top Overlay "3" at 77.483,108.204 h0.86 r180; Top Overlay "4" at 77.483,110.744 h0.86 r180; Top Overlay "5" at 77.483,113.284 h0.86 r180; Top Overlay "GND" at 31.877,75.438 h0.86; Top Overlay "13" at 31.877,77.978 h0.86; Top Overlay "12" at 31.877,80.518 h0.86; Top Overlay "11" at 31.877,83.058 h0.86; Top Overlay "AREF" at 31.877,72.898 h0.86; Top Overlay "10" at 31.877,85.598 h0.86; Top Overlay "9" at 31.877,88.138 h0.86; Top Overlay "8" at 31.877,90.678 h0.86; Top Overlay "7" at 31.877,94.488 h0.86; Top Overlay "6" at 31.877,97.028 h0.86; Top Overlay "5" at 31.877,99.568 h0.86; Top Overlay "4" at 31.877,102.108 h0.86; Top Overlay "3" at 31.877,104.648 h0.86; Top Overlay "2" at 31.877,107.188 h0.86; Top Overlay "TX" at 31.877,109.728 h0.86; Top Overlay "RX" at 31.877,112.268 h0.86; Top Overlay "SDA" at 31.877,70.358 h0.86; Top Overlay "SCL" at 31.877,67.818 h0.86; Top Overlay "IOREF" at 77.483,80.264 h0.86 r180; Mechanical 16 "RST" at 55.372,110.617 h0.43; Mechanical 16 "ISP" at 52.959,113.792 h0.43